# EAGLE board USB to UART CP2102 for ESP32 (EAGLE 9.6.2)

Size 100 x 80 mm. Coordinates in mm from the lower left corner, seen from the top.
Outline: 0,0 100,0 100,80 0,80 0,0
Copper layers (1*16): Top 0.035mm / dielectric 1.5mm / Bottom 0.035mm
Design rules "default": minimum track width 6mil, minimum drill 0.35mm, track to track 6mil, track to pad 6mil, pad to pad 6mil, via to via 6mil, smd to smd 6mil, copper to edge 40mil, drill to drill 6mil, minimum pad ring 10mil, minimum via ring 8mil, stop-mask expansion 4mil, vias tented up to drill 0mil, thermal gap 10mil

## Footprints (pad centres in the part's own frame; a part is rotated, then mirrored left to right if it is on the bottom)
C0603 = smd 1.1 x 1: 1 -0.85,0; 2 0.85,0
ESD05V88DLC = smd 0.35 x 0.6: 1 -0.325,0; 2 0.325,0
PTC-1206 = smd 1 x 1.8: 1 -1.4,0; 2 1.4,0
QFN50P500X500X100-29N = smd 1 x 0.3: 1 -2.35,1.5; 2 -2.35,1; 3 -2.35,0.5; 4 -2.35,0; 5 -2.35,-0.5; 6 -2.35,-1; 7 -2.35,-1.5; 15 2.35,-1.5; 16 2.35,-1; 17 2.35,-0.5; 18 2.35,0; 19 2.35,0.5; 20 2.35,1; 21 2.35,1.5 | smd 0.3 x 1: 8 -1.5,-2.35; 9 -1,-2.35; 10 -0.5,-2.35; 11 0,-2.35; 12 0.5,-2.35; 13 1,-2.35; 14 1.5,-2.35; 22 1.5,2.35; 23 1,2.35; 24 0.5,2.35; 25 0,2.35; 26 -0.5,2.35; 27 -1,2.35; 28 -1.5,2.35 | smd 3.35 x 3.35: 29 0,0
USB-B-MICRO-SMD_V03 = smd 1.45 x 0.4: D+ 2.725,0; D- 2.725,0.65; GND 2.725,-1.3; ID 2.725,-0.65; VBUS 2.725,1.3 | smd 1.5 x 1.8: SHIELD1 0,3.685; SHIELD2 0,-3.685 | smd 1.5 x 2.5: SHIELD3 0,0 | hole 0.85: 2.2,1.9; 2.2,-1.9
SC70-6 = smd 0.3 x 0.66: 1 -0.65,-0.92; 2 0,-0.92; 3 0.65,-0.92; 4 0.65,0.92; 5 0,0.92; 6 -0.65,0.92
R0603 = smd 1 x 1.1: 1 -0.85,0; 2 0.85,0
TACTILE_SWITCH_SMD_4.6X2.8MM = smd 0.9 x 1: 1 -2.05,-0.8; 2 2.05,-0.8; 3 2.05,0.8; 4 -2.05,0.8
L06P = drill 1.016 long: 1 6.25,-6.25; 2 3.75,-6.25; 3 1.25,-6.25; 4 -1.25,-6.25; 5 -3.75,-6.25; 6 -6.25,-6.25

## Placement (x,y rotation side)
C21  100nF/ 50v  [C0603]  -41.91,20.32 0 top  (outside the outline)
C22  1uF/16v  [C0603]  -30.48,27.94 0 top  (outside the outline)
C25  100nF/ 50v  [C0603]  -21.59,27.94 0 top  (outside the outline)
C26  1uF/16v  [C0603]  -39.37,27.94 0 top  (outside the outline)
D4  ESD05V88D-LC  [ESD05V88DLC]  -24.13,38.1 0 top  (outside the outline)
D8  ESD05V88D-LC  [ESD05V88DLC]  -20.32,41.91 0 top  (outside the outline)
D9  ESD05V88D-LC  [ESD05V88DLC]  -35.56,41.91 0 top  (outside the outline)
F2  500mA  [PTC-1206]  -15.24,38.1 0 top  (outside the outline)
IC5  CP2102  [QFN50P500X500X100-29N]  -16.51,21.59 0 top  (outside the outline)
JP2  [USB-B-MICRO-SMD_V03]  -36.83,5.08 0 top  (outside the outline)
Q4  MBT3904DW1T1  [SC70-6]  -40.64,33.02 0 top  (outside the outline)
R14  10KΩ  [R0603]  -17.78,33.02 0 top  (outside the outline)
R19  1KΩ  [R0603]  -35.56,33.02 0 top  (outside the outline)
R20  10KΩ  [R0603]  -24.13,33.02 0 top  (outside the outline)
R21  10KΩ  [R0603]  -30.48,33.02 0 top  (outside the outline)
S3  RESET  [TACTILE_SWITCH_SMD_4.6X2.8MM]  -22.86,20.32 0 top  (outside the outline)
S4  BTN-0  [TACTILE_SWITCH_SMD_4.6X2.8MM]  -29.21,20.32 0 top  (outside the outline)
SV1  [L06P]  -22.86,10.16 0 top  (outside the outline)

## Library data of the parts
C21 C22 C25 C26 = rcl; SPICEPREFIX: C
D4 D8 D9 = ESD05V88D-LC; DESCRIPTION: Bi-directional TVS Diode for ESD Protection; HEIGHT: 0.55mm; MANUFACTURER_NAME: SOCAY Elec; MANUFACTURER_PART_NUMBER: ESD05V88D-LC
F2 = SparkFun-PowerIC; PROD_ID: RES-11150
IC5 = CP2102; DESCRIPTION: USB Interface IC; HEIGHT: 1mm; MANUFACTURER_NAME: Silicon Labs; MANUFACTURER_PART_NUMBER: CP2102; MOUSER_PART_NUMBER: 634-CP2102; MOUSER_PRICE-STOCK: https://www.mouser.co.uk/ProductDetail/Silicon-Labs/CP2102?qs=ucY0lxHzU7615lOm95XT0w%3D%3D
JP2 = SparkFun-Connectors; PROD_ID: CONN-11752
Q4 = esp32-thing-temp; PROD_ID: TRANS-13337
R14 R19-R21 = rcl; SPICEPREFIX: R
S3 S4 = SparkFun-Electromechanical; PROD_ID: SWCH-13065
SV1 = con-amp-mt; OC_FARNELL: unknown; OC_NEWARK: unknown

## Nets
ACTıVE: IC5.11 R14.1
DTR: IC5.28 Q4.1 R20.1
EN: Q4.3 S3.1 S3.2 SV1.3
GND: C21.1 C22.1 C25.1 C26.1 D4.2 D8.2 D9.2 IC5.3 JP2.GND R14.2 S3.3 S3.4 S4.3 S4.4 SV1.6
IO0: Q4.6 S4.1 S4.2 SV1.4
N$17: Q4.5 R20.2
N$18: Q4.2 R21.2
N$24: IC5.9 R19.1
RTS: IC5.24 Q4.4 R21.1
RXD: IC5.25 SV1.1
TXD: IC5.26 SV1.2
USB_DN: D4.1 IC5.5 JP2.D-
USB_DP: D8.1 IC5.4 JP2.D+
VCC: C25.2 C26.2 F2.2 IC5.8
VCC_USB: D9.1 F2.1 JP2.VBUS
VCCIO: C21.2 C22.2 IC5.6 IC5.7 R19.2 SV1.5

## Tracks (layer width: path | path; a pad name or v marks a point on that pad's centre or on a via)
ACTıVE  (1 unrouted)
DTR  (2 unrouted)
EN  (3 unrouted)
GND  (14 unrouted)
IO0  (3 unrouted)
N$17  (1 unrouted)
N$18  (1 unrouted)
N$24  (1 unrouted)
RTS  (2 unrouted)
RXD  (1 unrouted)
TXD  (1 unrouted)
USB_DN  (2 unrouted)
USB_DP  (2 unrouted)
VCC  (3 unrouted)
VCC_USB  (2 unrouted)
VCCIO  (5 unrouted)